# Altium PCB PCB.PcbDoc (part 1 of 2)
Units mil, origin at the board's own origin, x right, y up, seen from the top; angles counter-clockwise.
Board outline 3950.03 x 3160.03 mil, 2 copper layers (Top Layer, Bottom Layer); 198 components, 30 nets, 510 pads, 84 vias.
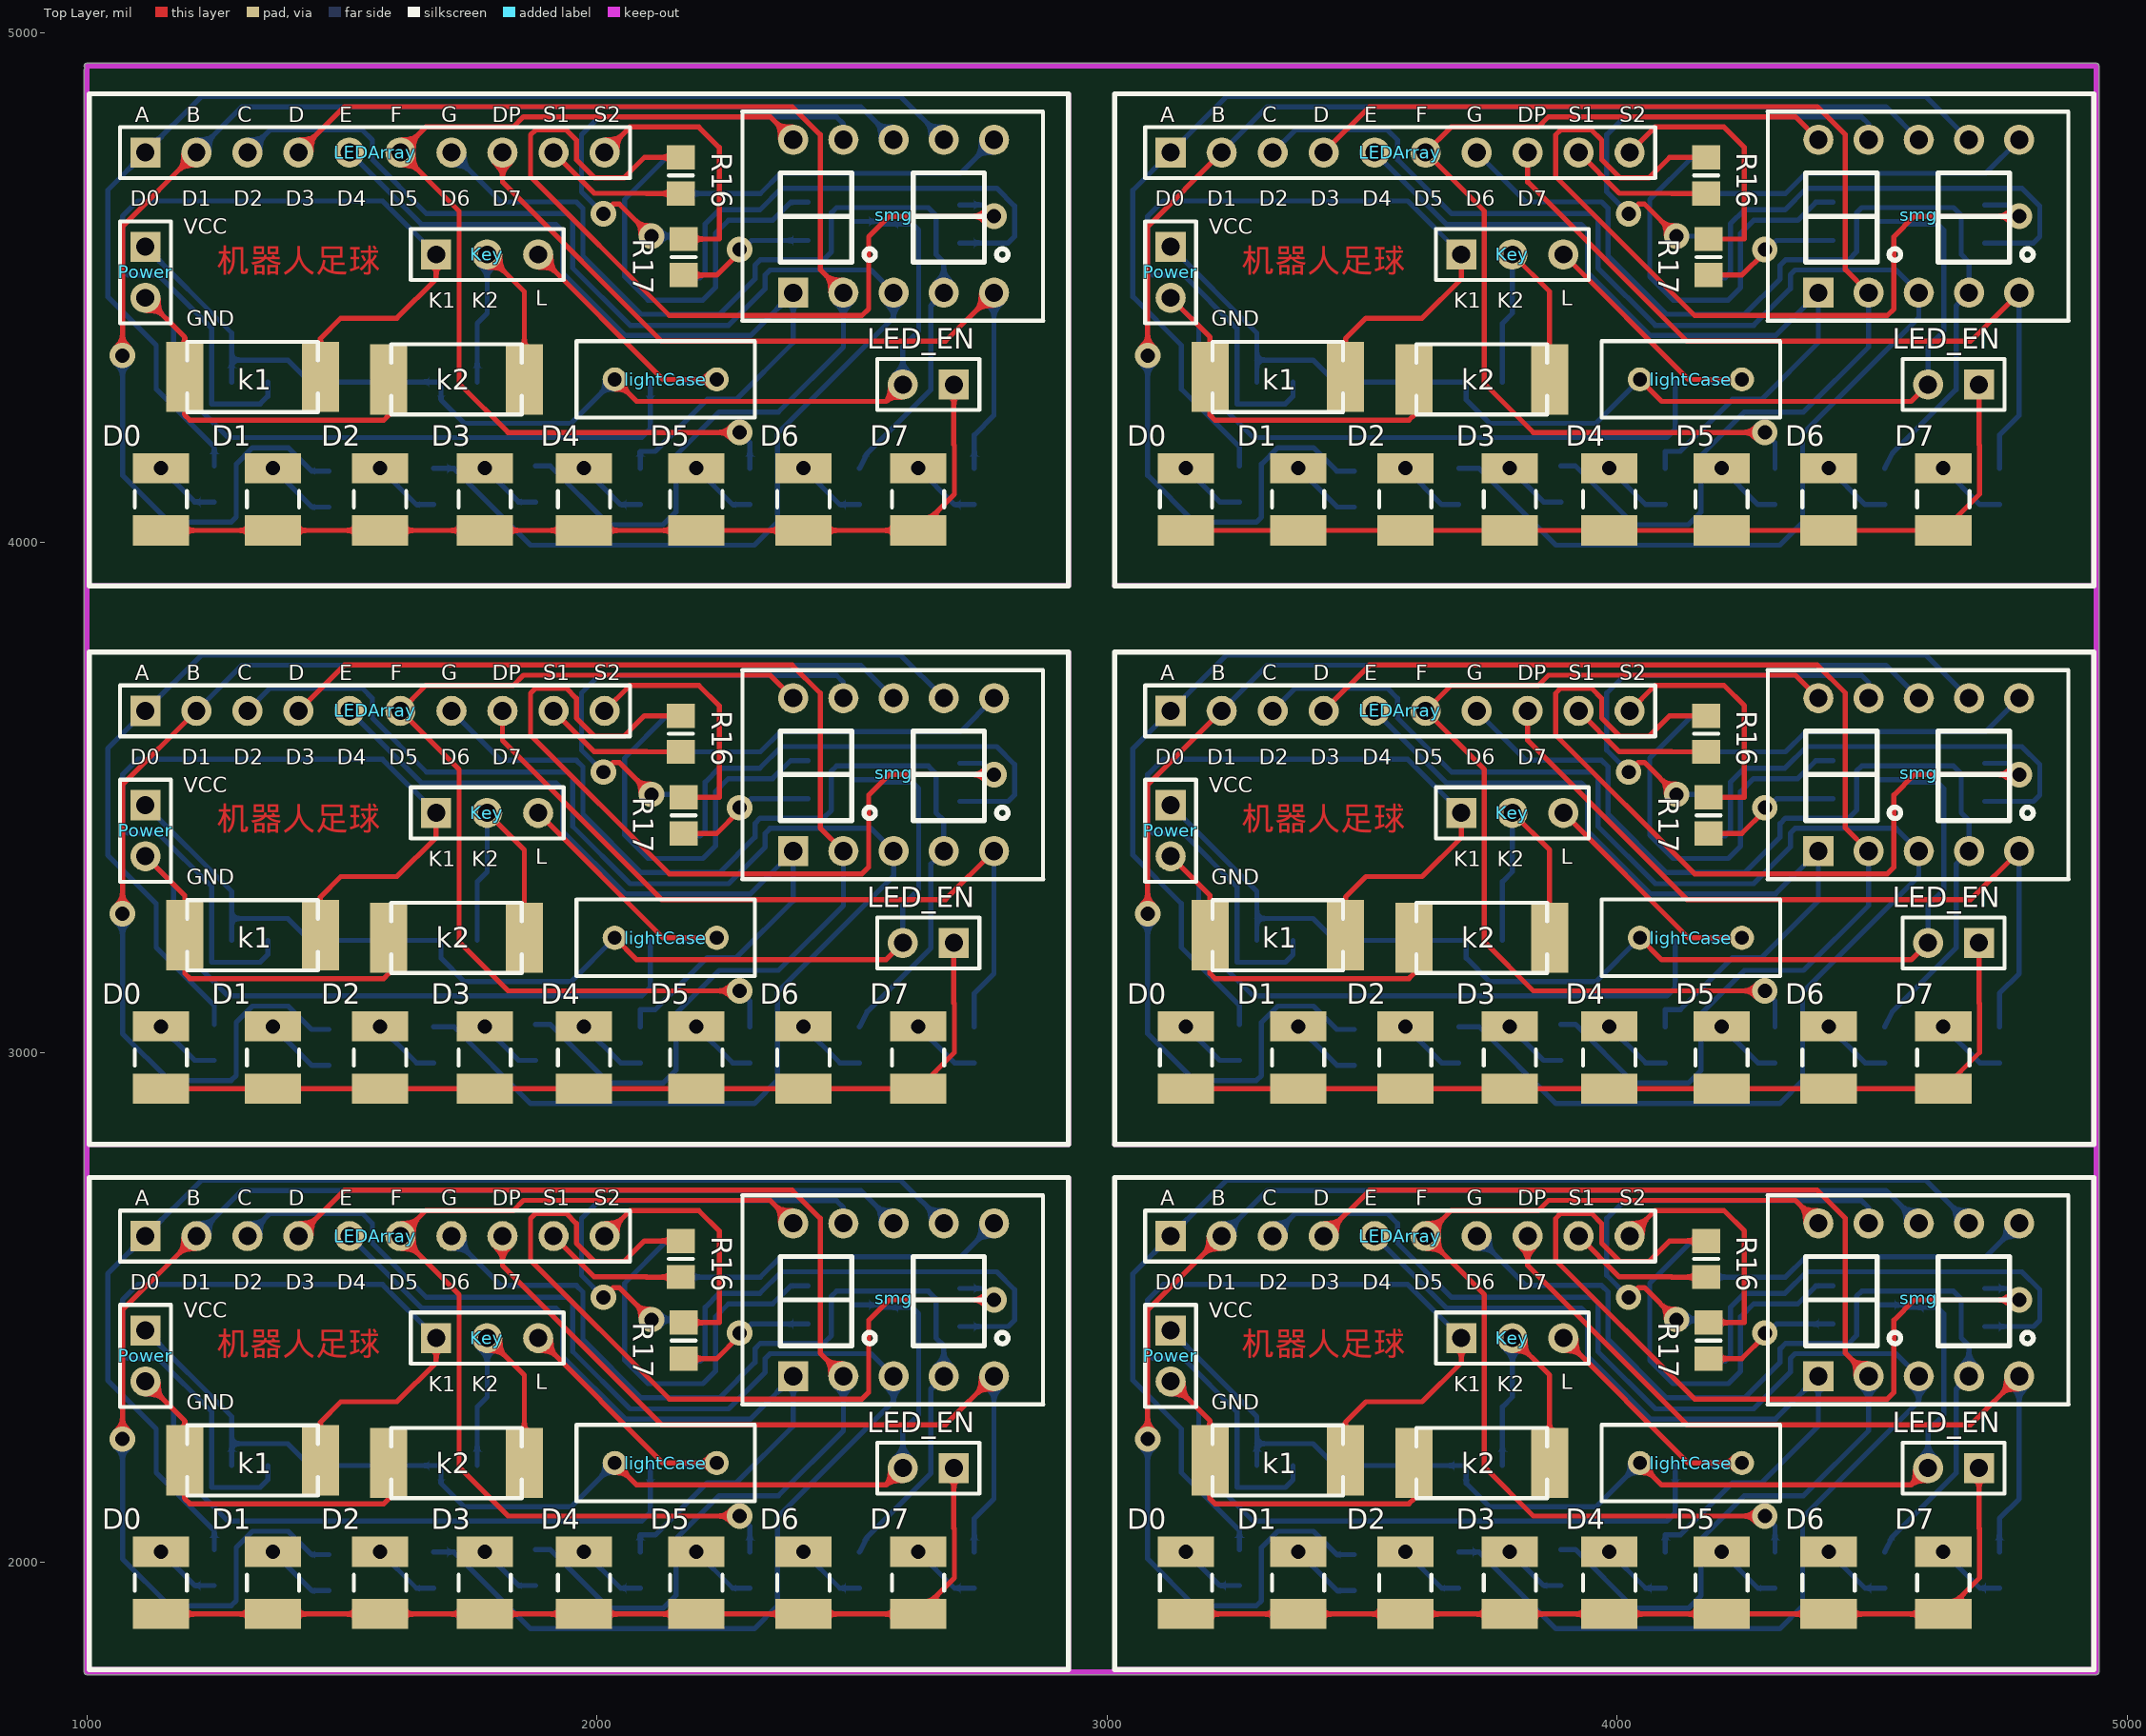
[diagram p0: Top Layer view]
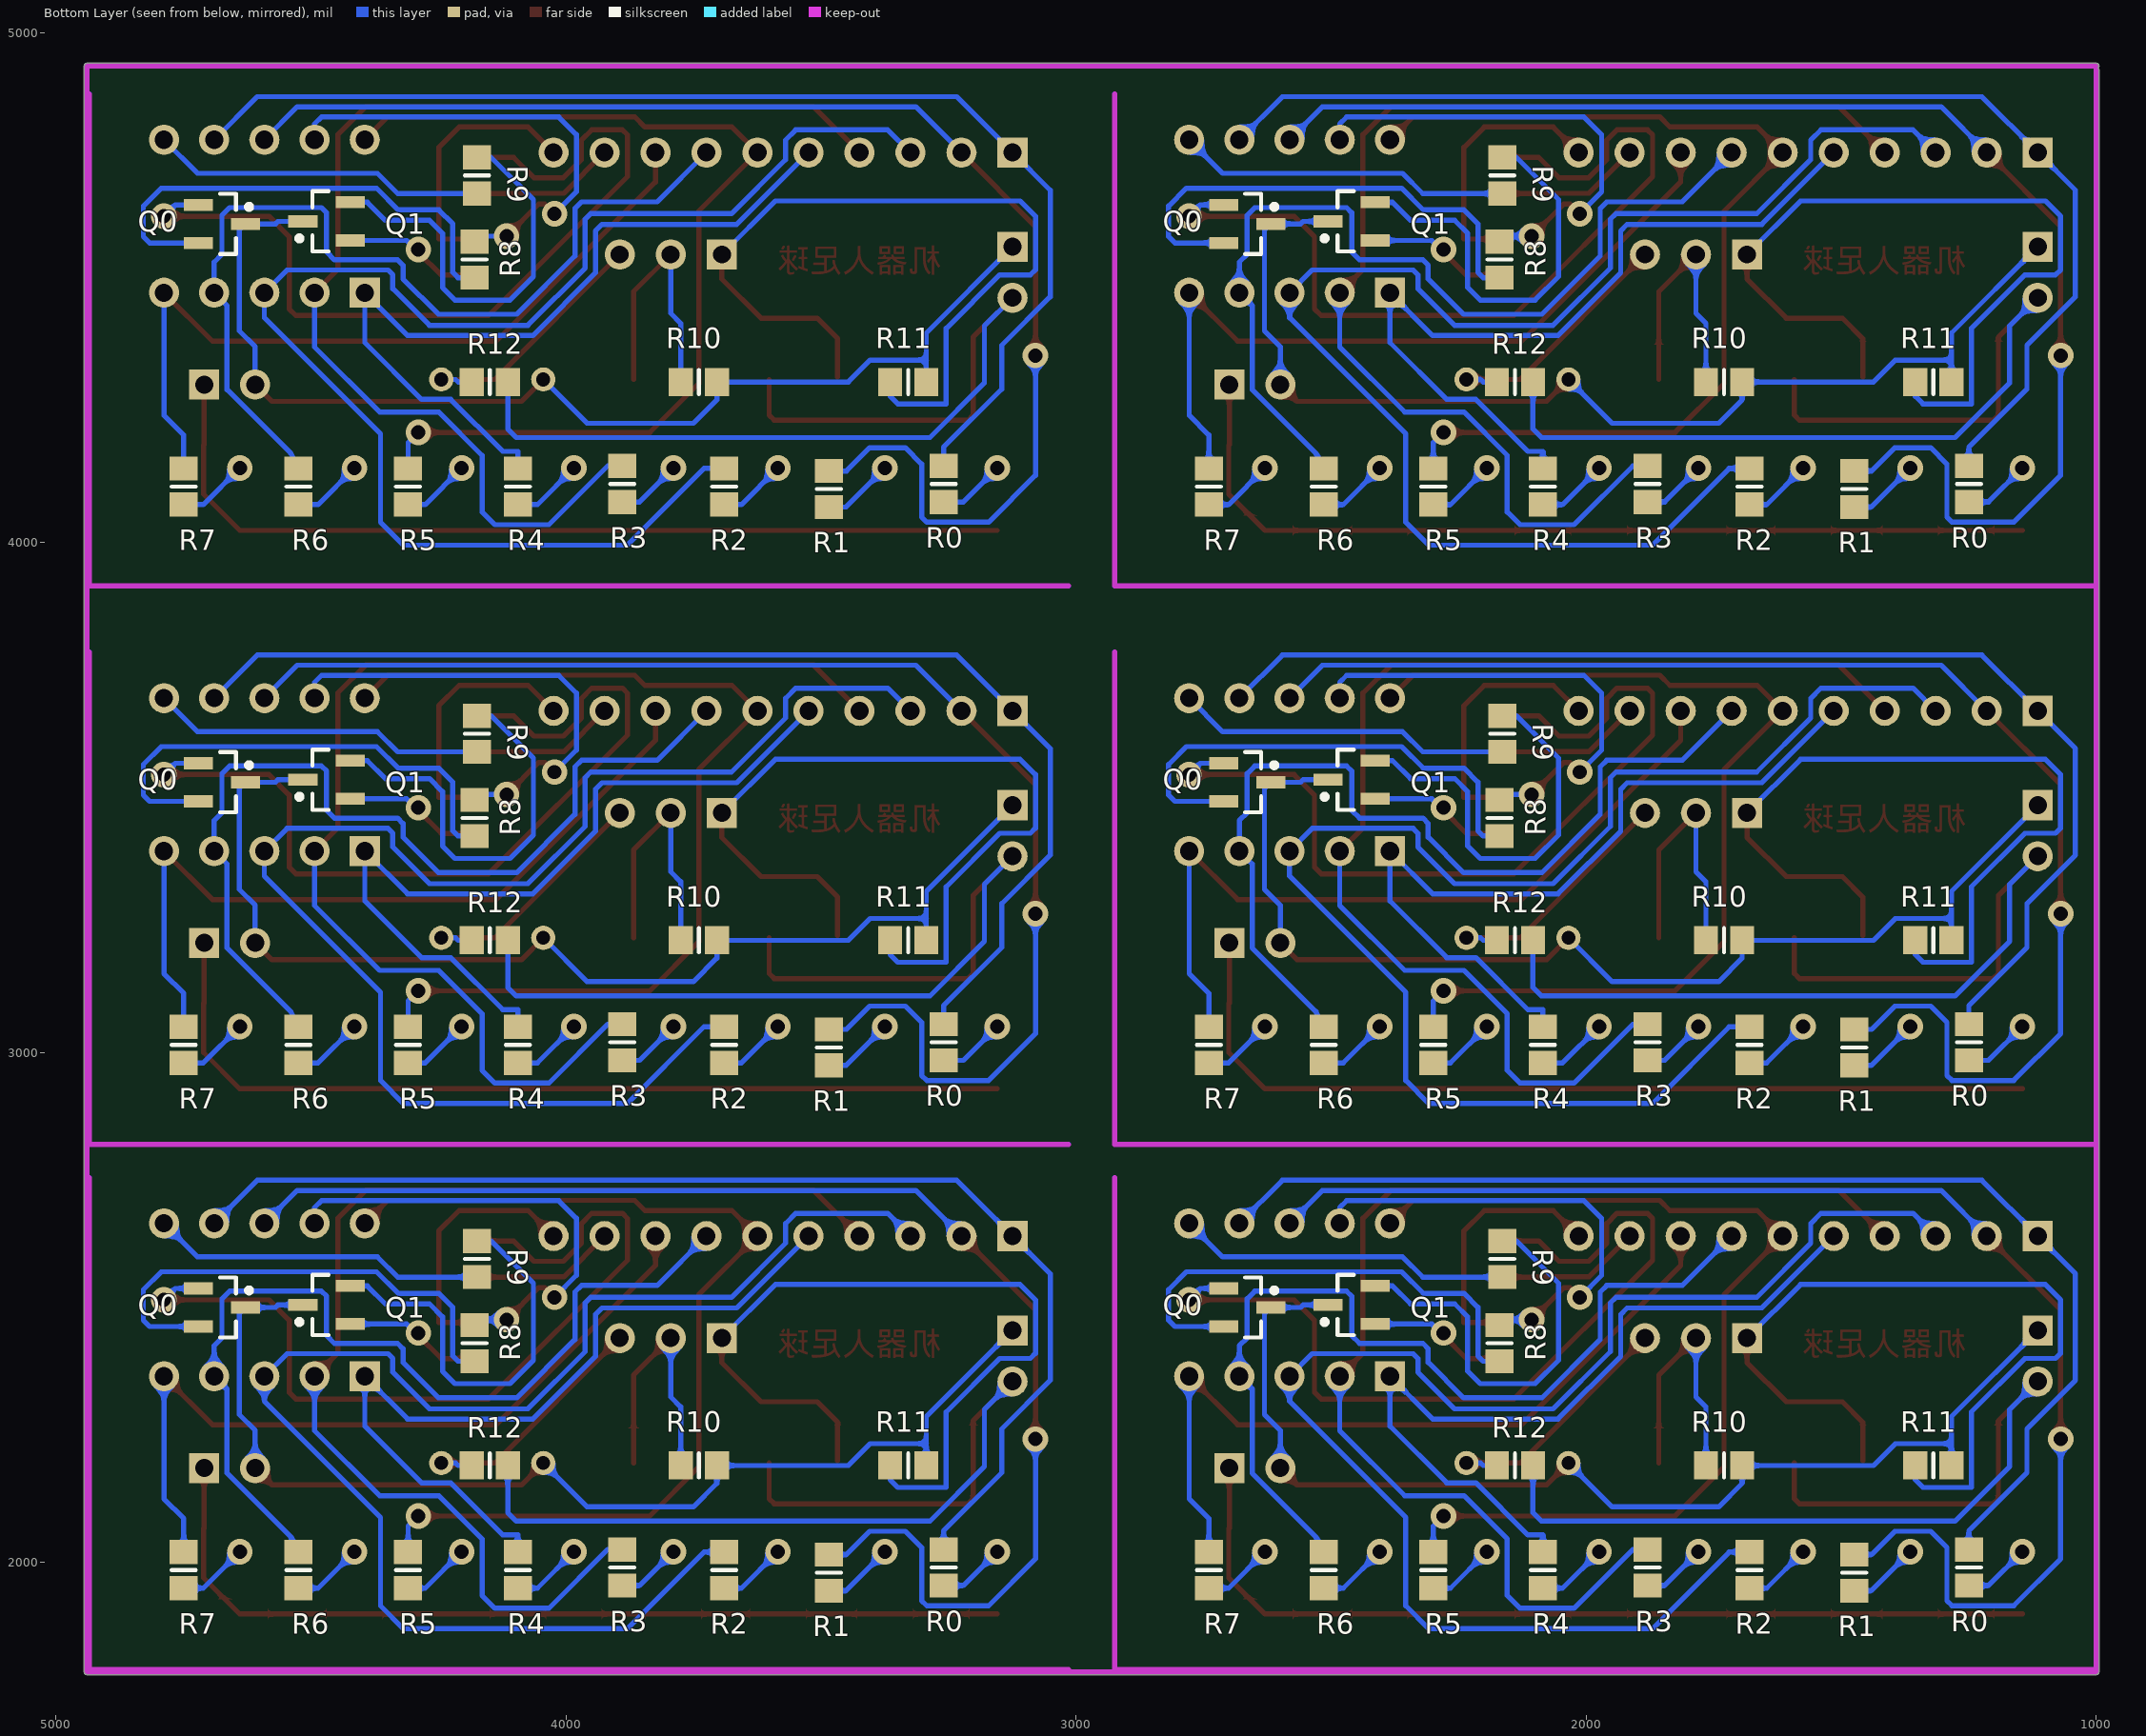
[diagram p1: Bottom Layer view, seen from below]

## Layer stack, top to bottom
Top Solder: solder mask 0.4, Solder Resist, Dk 3.5
Top Layer: signal copper 1.4
Dielectric 1: dielectric 12.6, FR-4, Dk 4.8
Bottom Layer: signal copper 1.4
Bottom Solder: solder mask 0.4, Solder Resist, Dk 3.5

## Board outline
994.99,1785 994.99,4927.01 cw(c1000,4927.01) 996.97,4931 cw(c1000,4935) 1000,4940.02 4940,4940.02 cw(c4940,4935) 4945.02,4935 4945.02,1785 cw(c4940,1785) 4940,1779.98 1000,1779.98 cw(c1000,1785)

## Design rules (kind name [scope] priority, off if disabled: settings)
Clearance [All] p1: gap=10
PolygonConnect [All] p1: connectstyle=Relief reliefconductorwidth=10 reliefentries=4 polygonreliefangle="90 Angle" airgapwidth=10
RoutingVias [All] p1: holewidth=28 width=50 viastyle="Through Hole" minholewidth=28 minwidth=50 maxholewidth=28 maxwidth=50
SolderMaskExpansion [All] p1: expansion=4
Width [All] p1: maxlimit=10 minlimit=10 preferedwidth=10
30 further rules are at their usual default settings.

## Classes and differential pairs
component class waterLEDSheet: J1 J2 J3

## Components (designator, comment, footprint, x,y, rotation, side; value= is the part's Value field where it differs from the comment)
D0 "LED0" C1210_M 1145,1960 r90 top
D0 "LED0" C1210_M 3155,1960 r90 top
D0 "LED0" C1210_M 1145,2990 r90 top
D0 "LED0" C1210_M 3155,2990 r90 top
D0 "LED0" C1210_M 3155,4085 r90 top
D0 "LED0" C1210_M 1145,4085 r90 top
D1 "LED0" C1210_M 1365,1960 r90 top
D1 "LED0" C1210_M 3375,1960 r90 top
D1 "LED0" C1210_M 1365,2990 r90 top
D1 "LED0" C1210_M 3375,2990 r90 top
D1 "LED0" C1210_M 3375,4085 r90 top
D1 "LED0" C1210_M 1365,4085 r90 top
D2 "LED0" C1210_M 1575,1960 r90 top
D2 "LED0" C1210_M 3585,1960 r90 top
D2 "LED0" C1210_M 1575,2990 r90 top
D2 "LED0" C1210_M 3585,2990 r90 top
D2 "LED0" C1210_M 3585,4085 r90 top
D2 "LED0" C1210_M 1575,4085 r90 top
D3 "LED0" C1210_M 1780,1960 r90 top
D3 "LED0" C1210_M 3790,1960 r90 top
D3 "LED0" C1210_M 1780,2990 r90 top
D3 "LED0" C1210_M 3790,2990 r90 top
D3 "LED0" C1210_M 3790,4085 r90 top
D3 "LED0" C1210_M 1780,4085 r90 top
D4 "LED0" C1210_M 1975,1960 r90 top
D4 "LED0" C1210_M 3985,1960 r90 top
D4 "LED0" C1210_M 1975,2990 r90 top
D4 "LED0" C1210_M 3985,2990 r90 top
D4 "LED0" C1210_M 3985,4085 r90 top
D4 "LED0" C1210_M 1975,4085 r90 top
D5 "LED0" C1210_M 2195,1960 r90 top
D5 "LED0" C1210_M 4205,1960 r90 top
D5 "LED0" C1210_M 2195,2990 r90 top
D5 "LED0" C1210_M 4205,2990 r90 top
D5 "LED0" C1210_M 4205,4085 r90 top
D5 "LED0" C1210_M 2195,4085 r90 top
D6 "LED0" C1210_M 2405,1960 r90 top
D6 "LED0" C1210_M 4415,1960 r90 top
D6 "LED0" C1210_M 2405,2990 r90 top
D6 "LED0" C1210_M 4415,2990 r90 top
D6 "LED0" C1210_M 4415,4085 r90 top
D6 "LED0" C1210_M 2405,4085 r90 top
D7 "LED0" C1210_M 2630,1960 r90 top
D7 "LED0" C1210_M 4640,1960 r90 top
D7 "LED0" C1210_M 2630,2990 r90 top
D7 "LED0" C1210_M 4640,2990 r90 top
D7 "LED0" C1210_M 4640,4085 r90 top
D7 "LED0" C1210_M 2630,4085 r90 top
k1 "SW-PB" KEY_SODFL_2-LEADS 1325,2200 r0 top
k1 "SW-PB" KEY_SODFL_2-LEADS 3335,2200 r0 top
k1 "SW-PB" KEY_SODFL_2-LEADS 1325,3230 r0 top
k1 "SW-PB" KEY_SODFL_2-LEADS 3335,3230 r0 top
k1 "SW-PB" KEY_SODFL_2-LEADS 3335,4325 r0 top
k1 "SW-PB" KEY_SODFL_2-LEADS 1325,4325 r0 top
k2 "SW-PB" KEY_SODFL_2-LEADS 1725,2195 r0 top
k2 "SW-PB" KEY_SODFL_2-LEADS 3735,2195 r0 top
k2 "SW-PB" KEY_SODFL_2-LEADS 1725,3225 r0 top
k2 "SW-PB" KEY_SODFL_2-LEADS 3735,3225 r0 top
k2 "SW-PB" KEY_SODFL_2-LEADS 3735,4320 r0 top
k2 "SW-PB" KEY_SODFL_2-LEADS 1725,4320 r0 top
Key "" HDR1X3 1685,2440 r0 top
Key "" HDR1X3 3695,2440 r0 top
Key "" HDR1X3 1685,3470 r0 top
Key "" HDR1X3 3695,3470 r0 top
Key "" HDR1X3 3695,4565 r0 top
Key "" HDR1X3 1685,4565 r0 top
LED_EN "" HDR1X2 2700,2185 r180 top
LED_EN "" HDR1X2 4710,2185 r180 top
LED_EN "" HDR1X2 2700,3215 r180 top
LED_EN "" HDR1X2 4710,3215 r180 top
LED_EN "" HDR1X2 4710,4310 r180 top
LED_EN "" HDR1X2 2700,4310 r180 top
LEDArray "NUM" HDR1X10 1115,2640 r0 top
LEDArray "NUM" HDR1X10 3125,2640 r0 top
LEDArray "NUM" HDR1X10 1115,3670 r0 top
LEDArray "NUM" HDR1X10 3125,3670 r0 top
LEDArray "NUM" HDR1X10 3125,4765 r0 top
LEDArray "NUM" HDR1X10 1115,4765 r0 top
lightCase "" RAD-0.2 2135,2195 r180 top
lightCase "" RAD-0.2 4145,2195 r180 top
lightCase "" RAD-0.2 2135,3225 r180 top
lightCase "" RAD-0.2 4145,3225 r180 top
lightCase "" RAD-0.2 4145,4320 r180 top
lightCase "" RAD-0.2 2135,4320 r180 top
Power "Header 2" HDR1X2 1115,2455 r270 top
Power "Header 2" HDR1X2 3125,2455 r270 top
Power "Header 2" HDR1X2 1115,3485 r270 top
Power "Header 2" HDR1X2 3125,3485 r270 top
Power "Header 2" HDR1X2 3125,4580 r270 top
Power "Header 2" HDR1X2 1115,4580 r270 top
Q0 "QNPN" SOT23_M 2665,2500 r180 bottom
Q0 "QNPN" SOT23_M 4675,2500 r180 bottom
Q0 "QNPN" SOT23_M 2665,3530 r180 bottom
Q0 "QNPN" SOT23_M 4675,3530 r180 bottom
Q0 "QNPN" SOT23_M 4675,4625 r180 bottom
Q0 "QNPN" SOT23_M 2665,4625 r180 bottom
Q1 "QNPN" SOT23_M 2460,2505 r0 bottom
Q1 "QNPN" SOT23_M 4470,2505 r0 bottom
Q1 "QNPN" SOT23_M 2460,3535 r0 bottom
Q1 "QNPN" SOT23_M 4470,3535 r0 bottom
Q1 "QNPN" SOT23_M 4470,4630 r0 bottom
Q1 "QNPN" SOT23_M 2460,4630 r0 bottom
R0 "510" 6-0805_N 1250,1990 r90 bottom
R0 "510" 6-0805_N 3260,1990 r90 bottom
R0 "510" 6-0805_N 1250,3020 r90 bottom
R0 "510" 6-0805_N 3260,3020 r90 bottom
R0 "510" 6-0805_N 3260,4115 r90 bottom
R0 "510" 6-0805_N 1250,4115 r90 bottom
R1 "510" 6-0805_N 1475,1980 r90 bottom
R1 "510" 6-0805_N 3485,1980 r90 bottom
R1 "510" 6-0805_N 1475,3010 r90 bottom
R1 "510" 6-0805_N 3485,3010 r90 bottom
R1 "510" 6-0805_N 3485,4105 r90 bottom
R1 "510" 6-0805_N 1475,4105 r90 bottom
R2 "510" 6-0805_N 1680,1985 r90 bottom
R2 "510" 6-0805_N 3690,1985 r90 bottom
R2 "510" 6-0805_N 1680,3015 r90 bottom
R2 "510" 6-0805_N 3690,3015 r90 bottom
R2 "510" 6-0805_N 3690,4110 r90 bottom
R2 "510" 6-0805_N 1680,4110 r90 bottom
R3 "510" 6-0805_N 1880,1990 r90 bottom
R3 "510" 6-0805_N 3890,1990 r90 bottom
R3 "510" 6-0805_N 1880,3020 r90 bottom
R3 "510" 6-0805_N 3890,3020 r90 bottom
R3 "510" 6-0805_N 3890,4115 r90 bottom
R3 "510" 6-0805_N 1880,4115 r90 bottom
R4 "510" 6-0805_N 2085,1985 r90 bottom
R4 "510" 6-0805_N 4095,1985 r90 bottom
R4 "510" 6-0805_N 2085,3015 r90 bottom
R4 "510" 6-0805_N 4095,3015 r90 bottom
R4 "510" 6-0805_N 4095,4110 r90 bottom
R4 "510" 6-0805_N 2085,4110 r90 bottom
R5 "510" 6-0805_N 2300,1985 r90 bottom
R5 "510" 6-0805_N 4310,1985 r90 bottom
R5 "510" 6-0805_N 2300,3015 r90 bottom
R5 "510" 6-0805_N 4310,3015 r90 bottom
R5 "510" 6-0805_N 4310,4110 r90 bottom
R5 "510" 6-0805_N 2300,4110 r90 bottom
R6 "510" 6-0805_N 2515,1985 r90 bottom
R6 "510" 6-0805_N 4525,1985 r90 bottom
R6 "510" 6-0805_N 2515,3015 r90 bottom
R6 "510" 6-0805_N 4525,3015 r90 bottom
R6 "510" 6-0805_N 4525,4110 r90 bottom
R6 "510" 6-0805_N 2515,4110 r90 bottom
R7 "510" 6-0805_N 2740,1985 r90 bottom
R7 "510" 6-0805_N 4750,1985 r90 bottom
R7 "510" 6-0805_N 2740,3015 r90 bottom
R7 "510" 6-0805_N 4750,3015 r90 bottom
R7 "510" 6-0805_N 4750,4110 r90 bottom
R7 "510" 6-0805_N 2740,4110 r90 bottom
R8 "" 6-0805_N 2170,2430 r90 bottom
R8 "" 6-0805_N 4180,2430 r90 bottom
R8 "" 6-0805_N 2170,3460 r90 bottom
R8 "" 6-0805_N 4180,3460 r90 bottom
R8 "" 6-0805_N 4180,4555 r90 bottom
R8 "" 6-0805_N 2170,4555 r90 bottom
R9 "" 6-0805_N 2165,2595 r270 bottom
R9 "" 6-0805_N 4175,2595 r270 bottom
R9 "" 6-0805_N 2165,3625 r270 bottom
R9 "" 6-0805_N 4175,3625 r270 bottom
R9 "" 6-0805_N 4175,4720 r270 bottom
R9 "" 6-0805_N 2165,4720 r270 bottom
R10 "" 6-0805_N 1730,2190 r0 bottom
R10 "" 6-0805_N 3740,2190 r0 bottom
R10 "" 6-0805_N 1730,3220 r0 bottom
R10 "" 6-0805_N 3740,3220 r0 bottom
R10 "" 6-0805_N 3740,4315 r0 bottom
R10 "" 6-0805_N 1730,4315 r0 bottom
R11 "" 6-0805_N 1319.57,2190 r180 bottom
R11 "" 6-0805_N 3329.57,2190 r180 bottom
R11 "" 6-0805_N 1319.57,3220 r180 bottom
R11 "" 6-0805_N 3329.57,3220 r180 bottom
R11 "" 6-0805_N 3329.57,4315 r180 bottom
R11 "" 6-0805_N 1319.57,4315 r180 bottom
R12 "Res3" 6-0805_N 2140,2190 r0 bottom
R12 "Res3" 6-0805_N 4150,2190 r0 bottom
R12 "Res3" 6-0805_N 2140,3220 r0 bottom
R12 "Res3" 6-0805_N 4150,3220 r0 bottom
R12 "Res3" 6-0805_N 4150,4315 r0 bottom
R12 "Res3" 6-0805_N 2140,4315 r0 bottom
R16 "Res2" 6-0805_N 2165,2595 r90 top
R16 "Res2" 6-0805_N 4175,2595 r90 top
R16 "Res2" 6-0805_N 2165,3625 r90 top
R16 "Res2" 6-0805_N 4175,3625 r90 top
R16 "Res2" 6-0805_N 4175,4720 r90 top
R16 "Res2" 6-0805_N 2165,4720 r90 top
R17 "Res2" 6-0805_N 2170,2435 r270 top
R17 "Res2" 6-0805_N 4180,2435 r270 top
R17 "Res2" 6-0805_N 2170,3465 r270 top
R17 "Res2" 6-0805_N 4180,3465 r270 top
R17 "Res2" 6-0805_N 4180,4560 r270 top
R17 "Res2" 6-0805_N 2170,4560 r270 top
smg "Component_1" NIXIE_LIGHT 2520,2575 r0 top
smg "Component_1" NIXIE_LIGHT 4530,2575 r0 top
smg "Component_1" NIXIE_LIGHT 2520,3605 r0 top
smg "Component_1" NIXIE_LIGHT 4530,3605 r0 top
smg "Component_1" NIXIE_LIGHT 4530,4700 r0 top
smg "Component_1" NIXIE_LIGHT 2520,4700 r0 top

## Footprints (in the part's own frame and the unit in brackets; to place one, negate y for a bottom-side part, rotate by r counter-clockwise, add the part's x,y. Pads: shape width x height; smd on the part's side, far side on the other; paste and mask are expansions set on the pad)
6-0805_N [mm] "Chip Resistor, Body 2.0x1.2mm, IPC Medium Density"
  rect 1.2x1.4 smd: 1(-0.9,0) 2(0.9,0)
  silkscreen extent 0,-0.6 0,0.6, body extent -1.07,-0.7 1.07,0.7, height 0.7
C1210_M [mm]
  rect 1.5x2.8 smd: 1(-1.55,0) 2(1.55,0)
  silkscreen extent -0.4,-1.3 0.4,1.3, body extent -1.7,-1.35 1.7,1.35, height 1.5
HDR1X2 [mm] "Connector; Header; 2 Position"
  rect 1.5x1.5 hole 0.9: 1(0,0)
  round 1.5 hole 0.9: 2(2.54,0)
  silkscreen extent -1.27,-1.27 3.81,1.27
HDR1X3 [mm] "Connector; Header; 3 Position"
  rect 1.5x1.5 hole 0.9: 1(0,0)
  round 1.5 hole 0.9: 2(2.54,0) 3(5.08,0)
  silkscreen extent -1.27,-1.27 6.35,1.27
HDR1X10 [mm] "Connector; Header; 10 Position"
  rect 1.5x1.5 hole 0.9: 1(0,0)
  round 1.5 hole 0.9: 2(2.54,0) 3(5.08,0) 4(7.62,0) 5(10.16,0) 6(12.7,0) 7(15.24,0) 8(17.78,0) 9(20.32,0) 10(22.86,0)
  silkscreen extent -1.27,-1.27 24.13,1.27
KEY_SODFL_2-LEADS [mm] "SODFL, 2-Leads, Body 3.25x8.00mm, IPC Medium Density"
  rect 1.85x3.5 smd: 1(-3.375,0) 2(3.375,0)
  silkscreen extent -3.25,-1.75 3.25,1.75, body extent -3.25,-1.65 3.25,1.85, height 2
NIXIE_LIGHT [mm]
  rect 1.5x1.5 hole 0.905: 1(-3.429,-5.334)
  round 1.5 hole 0.905: 2(-0.929,-5.334) 3(1.571,-5.334) 4(4.071,-5.334) 5(6.571,-5.334) 6(6.571,2.286) 7(4.071,2.286) 8(1.571,2.286) 9(-0.929,2.286) 10(-3.429,2.286)
  silkscreen extent -5.97,-6.73 9.03,3.68
RAD-0.2 [mm] "Radial Cap, Thru-Hole; 2 Leads; 0.2 in Pin Spacing"
  round 1.2 hole 0.7: 1(-2.54,0) 2(2.54,0)
  silkscreen extent -4.44,-1.91 4.44,1.91
SOT23_M [mm] "SOT23, 3-Leads, Body 2.9x1.3mm, Pitch 0.95mm, Lead Span 2.3mm - Reverse Pinning, IPC Low Density"
  rect 1.45x0.6 smd: 1(1.175,0) 2(-1.175,0.95) 3(-1.175,-0.95)
  silkscreen extent -0.1,-1.5 1.47,1.5, body extent -0.7,-1.5 0.7,1.5, height 1.1

## Part data
D0 D0 D0 D0 D0 D0 D1 D1 D1 D1 D1 D1 D2 D2 D2 D2 D2 D2 D3 D3 D3 D3 D3 D3 D4 D4 D4 D4 D4 D4 D5 D5 D5 D5 D5 D5 D6 D6 D6 D6 D6 D6 D7 D7 D7 D7 D7 D7: "Typical INFRARED GaAs LED"
k1 k1 k1 k1 k1 k1 k2 k2 k2 k2 k2 k2: "Switch"
Key Key Key Key Key Key: library part "Header 3", "Header, 3-Pin"
LED_EN LED_EN LED_EN LED_EN LED_EN LED_EN: library part "Header 2", "Header, 2-Pin"
LEDArray LEDArray LEDArray LEDArray LEDArray LEDArray: library part "Header 10", "Header, 10-Pin"
lightCase lightCase lightCase lightCase lightCase lightCase: library part "Res Adj1", "Variable Resistor"
Power Power Power Power Power Power: "Header, 2-Pin"
Q0 Q0 Q0 Q0 Q0 Q0 Q1 Q1 Q1 Q1 Q1 Q1: "NPN Bipolar Transistor"
R0 R0 R0 R0 R0 R0 R1 R1 R1 R1 R1 R1 R2 R2 R2 R2 R2 R2 R3 R3 R3 R3 R3 R3 R4 R4 R4 R4 R4 R4 R5 R5 R5 R5 R5 R5 R6 R6 R6 R6 R6 R6 R7 R7 R7 R7 R7 R7 R8 R8 R8 R8 R8 R8 R9 R9 R9 R9 R9 R9 R10 R10 R10 R10 R10 R10 R11 R11 R11 R11 R11 R11: library part Res2, "Resistor"
R12 R12 R12 R12 R12 R12 R16 R16 R16 R16 R16 R16 R17 R17 R17 R17 R17 R17: "Resistor"

## Via types
v1: diameter 50, hole 28, Top Layer to Bottom Layer, 84 vias

## Nets (pads, with @x,y where several pads share a name; then routed paths per layer and width w, separated by ;. In a path a pad name is that pad's centre, name@x,y a point inside that pad or via, vN(x,y) a via of type N, cw(c..) or ccw(c..) an arc to the next point about the centre after c; other vN are vias at no path point)
A: LEDArray.1@1115,4765 R0.2@1250,4150.43 smg.7@2680.28,4790 | length 2377.4
  Bottom Layer w10: R0.2@1250,4150.43 1250,4187 1136,4301 1136,4387 1041,4482 1041,4691 LEDArray.1@1115,4765 1224.53,4874.53 2595.75,4874.53 smg.7@2680.28,4790
B: LEDArray.2@1215,4765 R1.2@1475,4140.43 smg.8@2581.85,4790 | length 2707.1
  Top Layer w10: v1(1070,4367) 1070,4620 LEDArray.2@1215,4765
  Bottom Layer w10: v1(1070,4367) 1070,4132 1162,4040 1283,4040 1293,4050 1293,4154.02 1325,4186.02 1394.98,4186.02 1440.57,4140.43 R1.2@1475,4140.43 ; LEDArray.2@1215,4765 1304.53,4854.53 2517.32,4854.53 smg.8@2581.85,4790
C: LEDArray.3@1315,4765 R2.2@1680,4145.43 smg.3@2581.85,4490 | length 2901.3
  Bottom Layer w10: LEDArray.3@1315,4765 1359.53,4809.53 1540,4809.53 1560,4789.53 1560,4751 1666,4645 1942,4645 1952.72,4634.28 1952.72,4538.57 2065.21,4426.09 2258.12,4426.09 2330,4497.97 2330,4525 2339.53,4534.53 2537.32,4534.53 smg.3@2581.85,4490 2581.85,4440.92 2354,4213.07 2354,4040 2309,3995 1870.43,3995 1720,4145.43 R2.2@1680,4145.43
D: LEDArray.4@1415,4765 R3.2@1880,4150.43 smg.2@2483.43,4490 | length 2379
  Top Layer w10: LEDArray.4@1415,4765 1505,4855 2383,4855 2438,4800 2438,4535.43 smg.2@2483.43,4490
  Bottom Layer w10: R3.2@1880,4150.43 1908.57,4150.43 2024,4035 2130,4035 2155,4060 2155,4171 2240,4256 2356,4256 2483.43,4383.43 smg.2@2483.43,4490
DP: LEDArray.8@1815,4765 R7.2@2740,4145.43 smg.5@2778.7,4490 | length 1550.8
  Top Layer w10: LEDArray.8@1815,4765 1815,4707.09 2127.09,4395 2683.7,4395 smg.5@2778.7,4490
  Bottom Layer w10: R7.2@2740,4145.43 2740,4211 2778.7,4249.7 smg.5@2778.7,4490
E: LEDArray.5@1515,4765 R4.2@2085,4145.43 smg.1@2385,4490 | length 1621.3
  Bottom Layer w10: LEDArray.5@1515,4765 1656,4624 1920,4624 1932.72,4611.28 1932.72,4528.98 2055.61,4406.09 2301.09,4406.09 smg.1@2385,4490 2385,4392.24 2273.76,4281 2216.5,4281 2114.5,4179 2085,4179 R4.2@2085,4145.43
F: LEDArray.6@1615,4765 R5.2@2300,4145.43 smg.10@2385,4790 | length 1986.9
  Top Layer w10: v1(2280,4216) 1826,4216 1730,4312 1730,4650 LEDArray.6@1615,4765 1665,4815 1835.94,4815 1855.94,4835 2340,4835 smg.10@2385,4790
  Bottom Layer w10: v1(2280,4216) 2300,4196 R5.2@2300,4145.43
G: LEDArray.7@1715,4765 R6.2@2515,4145.43 smg.4@2680.28,4490 | length 1858.4
  Bottom Layer w10: LEDArray.7@1715,4765 1811.88,4668.12 1959.88,4668.12 1972.72,4655.28 1972.72,4562.19 2087.15,4447.77 2240.54,4447.77 2310,4517.22 2310,4544.06 2320.47,4554.53 2444.53,4554.53 2460,4570 2460,4647 2470,4657 2650,4657 2665,4642 2665,4565.28 2680.28,4550 smg.4@2680.28,4490 2655,4464.72 2655,4300 2530,4175 R6.2@2515,4145.43
GND: k1.1@1192.13,4325 k2.1@1592.13,4320 Power.2@1115,4480 R12.1@2104.57,4315 | length 2008.1
  Top Layer w10: Power.2@1115,4480 1192.13,4402.87 k1.1@1192.13,4325 1192.13,4250 1202.13,4240 1582.13,4240 1592.13,4250 k2.1@1592.13,4320
  Bottom Layer w10: Power.2@1115,4480 1170,4425 1170,4313 1276.98,4206.02 2087.93,4206.02 2104.57,4222.67 R12.1@2104.57,4315
K1: k1.2@1457.87,4325 Key.1@1685,4565 R11.1@1355,4315 | length 1689.4
  Top Layer w10: k1.2@1457.87,4325 1457.87,4400 1497.87,4440 1608,4440 1685,4517 Key.1@1685,4565
  Bottom Layer w10: R11.1@1355,4315 1355,4287 1340,4272 1245,4272 1245,4420 1140,4525 1080,4525 1070,4535 1070,4640 1100,4670 1580,4670 Key.1@1685,4565
K2: k2.2@1857.87,4320 Key.2@1785,4565 R10.2@1765.43,4315 | length 533.3
  Top Layer w10: Key.2@1785,4565 1857.87,4492.13 k2.2@1857.87,4320
  Bottom Layer w10: R10.2@1765.43,4315 1765.43,4430 1785,4449.57 Key.2@1785,4565
LIGHTCASE: Key.3@1885,4565 lightCase.1@2235,4320 R12.2@2175.43,4315 | length 513.1
  Top Layer w10: Key.3@1885,4565 2130,4320 lightCase.1@2235,4320
  Bottom Layer w10: R12.2@2175.43,4315 2202,4315 2207,4320 lightCase.1@2235,4320
NetD0_1: D0.1@1145,4023.98 D1.1@1365,4023.98 D2.1@1575,4023.98 D3.1@1780,4023.98 D4.1@1975,4023.98 D5.1@2195,4023.98 D6.1@2405,4023.98 D7.1@2630,4023.98 LED_EN.1@2700,4310 | length 1800.8
  Top Layer w10: D0.1@1145,4023.98 D1.1@1365,4023.98 D2.1@1575,4023.98 D3.1@1780,4023.98 D4.1@1975,4023.98 D5.1@2195,4023.98 D6.1@2405,4023.98 D7.1@2630,4023.98 2701,4094.98 2701,4191 2700,4192 LED_EN.1@2700,4310
NetD0_2: D0.2@1145,4146.02 R0.1@1250,4079.57 | length 132.5
  Bottom Layer w10: v1(1145,4146.02) 1211.46,4079.57 R0.1@1250,4079.57
NetD1_2: D1.2@1365,4146.02 R1.1@1475,4069.57 | length 141.7
  Bottom Layer w10: v1(1365,4146.02) 1441.46,4069.57 R1.1@1475,4069.57
NetD2_2: D2.2@1575,4146.02 R2.1@1680,4074.57 | length 134.6
  Bottom Layer w10: v1(1575,4146.02) 1646.46,4074.57 R2.1@1680,4074.57
NetD3_2: D3.2@1780,4146.02 R3.1@1880,4079.57 | length 127.5
  Bottom Layer w10: v1(1780,4146.02) 1846.46,4079.57 R3.1@1880,4079.57
NetD4_2: D4.2@1975,4146.02 R4.1@2085,4074.57 | length 139.6
  Bottom Layer w10: v1(1975,4146.02) 2046.46,4074.57 R4.1@2085,4074.57
NetD5_2: D5.2@2195,4146.02 R5.1@2300,4074.57 | length 134.6
  Bottom Layer w10: v1(2195,4146.02) 2266.46,4074.57 R5.1@2300,4074.57
NetD6_2: D6.2@2405,4146.02 R6.1@2515,4074.57 | length 139.6
  Bottom Layer w10: v1(2405,4146.02) 2476.46,4074.57 R6.1@2515,4074.57
NetD7_2: D7.2@2630,4146.02 R7.1@2740,4074.57 | length 139.6
  Bottom Layer w10: v1(2630,4146.02) 2701.46,4074.57 R7.1@2740,4074.57
NetQ0_2: Q0.2@2711.26,4662.4 R16.2@2165,4755.43 | length 1721.2
  Top Layer w10: R16.2@2165,4755.43 2093.43,4755.43 2053.53,4715.53 1995.47,4715.53 1960,4751 1960,4789.53 1940,4809.53 1880,4809.53 1870,4799.53 1870,4717.75 2142.27,4445.47 2520,4445.47 2533,4458.47 2533,4600 2573,4640 v1(2779,4640)
  Bottom Layer w10: Q0.2@2711.26,4662.4 2756.6,4662.4 v1(2779,4640)
NetQ0_3: Q0.3@2711.26,4587.6 R8.1@2170,4519.57 | length 964.8
  Bottom Layer w10: R8.1@2170,4519.57 2202.13,4519.57 2212.56,4530 2212.56,4625.16 2240,4652.6 2319.6,4652.6 2362,4695 2784,4695 2819,4660 2819,4600 2806.6,4587.6 Q0.3@2711.26,4587.6
NetQ1_2: Q1.2@2413.74,4592.6 R17.2@2170,4524.57 | length 275.1
  Top Layer w10: R17.2@2170,4524.57 2234.97,4524.57 2280,4569.6 v1(2280,4575)
  Bottom Layer w10: v1(2280,4575) 2285.4,4575 2303,4592.6 Q1.2@2413.74,4592.6
NetQ1_3: Q1.3@2413.74,4667.4 R9.1@2165,4755.43 | length 816.1
  Bottom Layer w10: R9.1@2165,4755.43 2137.43,4755.43 2054.44,4672.44 2054.44,4521.56 2100.44,4475.56 2208.12,4475.56 2232.56,4500 2232.56,4606.56 2258,4632 2344.6,4632 2380,4667.4 Q1.3@2413.74,4667.4
NetR8_2: R8.2@2170,4590.43 smg.9@2483.43,4790 | length 938.7
  Top Layer w10: v1(2013,4645) 2032,4664 2044,4664 v1(2107,4601)
  Bottom Layer w10: v1(2013,4645) 1970,4688 1970,4800 2004.53,4834.53 2470,4834.53 2483.43,4821.1 smg.9@2483.43,4790 ; v1(2107,4601) 2170,4601 R8.2@2170,4590.43
NetR9_2: R9.2@2165,4684.57 smg.6@2778.7,4790 | length 657.4
  Bottom Layer w10: R9.2@2165,4684.57 2320.55,4684.57 2360.2,4724.21 2712.91,4724.21 smg.6@2778.7,4790
S1: LEDArray.9@1915,4765 R16.1@2165,4684.57 | length 283.3
  Top Layer w10: LEDArray.9@1915,4765 1995,4685 2097.2,4685 2097.63,4684.57 R16.1@2165,4684.57
S2: LEDArray.10@2015,4765 R17.1@2170,4595.43 | length 511.8
  Top Layer w10: LEDArray.10@2015,4765 2065,4815 2200,4815 2240,4775 2240,4595.43 R17.1@2170,4595.43
VCC: LED_EN.2@2600,4310 lightCase.2@2035,4320 Power.1@1115,4580 Q0.1@2618.74,4625 Q1.1@2506.26,4630 R10.1@1694.57,4315 R11.2@1284.13,4315 | length 2237.4
  Top Layer w10: lightCase.2@2035,4320 2078,4277 2567,4277 LED_EN.2@2600,4310
  Bottom Layer w10: Power.1@1115,4580 1284.13,4410.87 1284.13,4358 ; R11.2@1284.13,4315 1284.13,4358 ; lightCase.2@2035,4320 1949,4234 1740.57,4234 1694.57,4280 R10.1@1694.57,4315 1437,4315 1394,4358 1284.13,4358 ; Q1.1@2506.26,4630 2555.2,4630 2560.2,4625 Q0.1@2618.74,4625 2631,4612.74 2631,4415 2600,4384 LED_EN.2@2600,4310
pads on no net: D0.1@1145,1898.98 D0.1@1145,2928.98 D0.1@3155,1898.98 D0.1@3155,2928.98 D0.1@3155,4023.98 D0.2@1145,2021.02 D0.2@1145,3051.02 D0.2@3155,2021.02 D0.2@3155,3051.02 D0.2@3155,4146.02 D1.1@1365,1898.98 D1.1@1365,2928.98 D1.1@3375,1898.98 D1.1@3375,2928.98 D1.1@3375,4023.98 D1.2@1365,2021.02 D1.2@1365,3051.02 D1.2@3375,2021.02 D1.2@3375,3051.02 D1.2@3375,4146.02 D2.1@1575,1898.98 D2.1@1575,2928.98 D2.1@3585,1898.98 D2.1@3585,2928.98 D2.1@3585,4023.98 D2.2@1575,2021.02 D2.2@1575,3051.02 D2.2@3585,2021.02 D2.2@3585,3051.02 D2.2@3585,4146.02 D3.1@1780,1898.98 D3.1@1780,2928.98 D3.1@3790,1898.98 D3.1@3790,2928.98 D3.1@3790,4023.98 D3.2@1780,2021.02 D3.2@1780,3051.02 D3.2@3790,2021.02 D3.2@3790,3051.02 D3.2@3790,4146.02 D4.1@1975,1898.98 D4.1@1975,2928.98 D4.1@3985,1898.98 D4.1@3985,2928.98 D4.1@3985,4023.98 D4.2@1975,2021.02 D4.2@1975,3051.02 D4.2@3985,2021.02 D4.2@3985,3051.02 D4.2@3985,4146.02 D5.1@2195,1898.98 D5.1@2195,2928.98 D5.1@4205,1898.98 D5.1@4205,2928.98 D5.1@4205,4023.98 D5.2@2195,2021.02 D5.2@2195,3051.02 D5.2@4205,2021.02 D5.2@4205,3051.02 D5.2@4205,4146.02 D6.1@2405,1898.98 D6.1@2405,2928.98 D6.1@4415,1898.98 D6.1@4415,2928.98 D6.1@4415,4023.98 D6.2@2405,2021.02 D6.2@2405,3051.02 D6.2@4415,2021.02 D6.2@4415,3051.02 D6.2@4415,4146.02 D7.1@2630,1898.98 D7.1@2630,2928.98 D7.1@4640,1898.98 D7.1@4640,2928.98 D7.1@4640,4023.98 D7.2@2630,2021.02 D7.2@2630,3051.02 D7.2@4640,2021.02 D7.2@4640,3051.02 D7.2@4640,4146.02 k1.1@1192.13,2200 k1.1@1192.13,3230 k1.1@3202.13,2200 k1.1@3202.13,3230 k1.1@3202.13,4325 k1.2@1457.87,2200 k1.2@1457.87,3230 k1.2@3467.87,2200 k1.2@3467.87,3230 k1.2@3467.87,4325 k2.1@1592.13,2195 k2.1@1592.13,3225 k2.1@3602.13,2195 k2.1@3602.13,3225 k2.1@3602.13,4320 k2.2@1857.87,2195 k2.2@1857.87,3225 k2.2@3867.87,2195 k2.2@3867.87,3225 k2.2@3867.87,4320 Key.1@1685,2440 Key.1@1685,3470 Key.1@3695,2440 Key.1@3695,3470 Key.1@3695,4565 Key.2@1785,2440 Key.2@1785,3470 Key.2@3795,2440 Key.2@3795,3470 Key.2@3795,4565 Key.3@1885,2440 Key.3@1885,3470 Key.3@3895,2440 Key.3@3895,3470 Key.3@3895,4565 LED_EN.1@2700,2185 LED_EN.1@2700,3215 LED_EN.1@4710,2185 LED_EN.1@4710,3215 LED_EN.1@4710,4310 LED_EN.2@2600,2185 LED_EN.2@2600,3215 LED_EN.2@4610,2185 LED_EN.2@4610,3215 LED_EN.2@4610,4310 LEDArray.1@1115,2640 LEDArray.1@1115,3670 LEDArray.1@3125,2640 LEDArray.1@3125,3670 LEDArray.1@3125,4765 LEDArray.2@1215,2640 LEDArray.2@1215,3670 LEDArray.2@3225,2640 LEDArray.2@3225,3670 LEDArray.2@3225,4765 LEDArray.3@1315,2640 LEDArray.3@1315,3670 LEDArray.3@3325,2640 LEDArray.3@3325,3670 LEDArray.3@3325,4765 LEDArray.4@1415,2640 LEDArray.4@1415,3670 LEDArray.4@3425,2640 LEDArray.4@3425,3670 LEDArray.4@3425,4765 LEDArray.5@1515,2640 LEDArray.5@1515,3670 LEDArray.5@3525,2640 LEDArray.5@3525,3670 LEDArray.5@3525,4765 LEDArray.6@1615,2640 LEDArray.6@1615,3670 LEDArray.6@3625,2640 LEDArray.6@3625,3670 LEDArray.6@3625,4765 LEDArray.7@1715,2640 LEDArray.7@1715,3670 LEDArray.7@3725,2640 LEDArray.7@3725,3670 LEDArray.7@3725,4765 LEDArray.8@1815,2640 LEDArray.8@1815,3670 LEDArray.8@3825,2640 LEDArray.8@3825,3670 LEDArray.8@3825,4765 LEDArray.9@1915,2640 LEDArray.9@1915,3670 LEDArray.9@3925,2640 LEDArray.9@3925,3670 LEDArray.9@3925,4765 LEDArray.10@2015,2640 LEDArray.10@2015,3670 LEDArray.10@4025,2640 LEDArray.10@4025,3670 LEDArray.10@4025,4765 lightCase.1@2235,2195 lightCase.1@2235,3225 lightCase.1@4245,2195 lightCase.1@4245,3225 lightCase.1@4245,4320 lightCase.2@2035,2195 lightCase.2@2035,3225 lightCase.2@4045,2195 lightCase.2@4045,3225 lightCase.2@4045,4320 Power.1@1115,2455 Power.1@1115,3485 Power.1@3125,2455 Power.1@3125,3485 Power.1@3125,4580 Power.2@1115,2355 Power.2@1115,3385 Power.2@3125,2355 Power.2@3125,3385 Power.2@3125,4480 Q0.1@2618.74,2500 Q0.1@2618.74,3530 Q0.1@4628.74,2500 Q0.1@4628.74,3530 Q0.1@4628.74,4625 Q0.2@2711.26,2537.4 Q0.2@2711.26,3567.4 Q0.2@4721.26,2537.4 Q0.2@4721.26,3567.4 Q0.2@4721.26,4662.4 Q0.3@2711.26,2462.6 Q0.3@2711.26,3492.6 Q0.3@4721.26,2462.6 Q0.3@4721.26,3492.6 Q0.3@4721.26,4587.6 Q1.1@2506.26,2505 Q1.1@2506.26,3535 Q1.1@4516.26,2505 Q1.1@4516.26,3535 Q1.1@4516.26,4630 Q1.2@2413.74,2467.6 Q1.2@2413.74,3497.6 Q1.2@4423.74,2467.6 Q1.2@4423.74,3497.6 Q1.2@4423.74,4592.6 Q1.3@2413.74,2542.4 Q1.3@2413.74,3572.4 Q1.3@4423.74,2542.4 Q1.3@4423.74,3572.4 Q1.3@4423.74,4667.4 R0.1@1250,1954.57 R0.1@1250,2984.57 R0.1@3260,1954.57 R0.1@3260,2984.57 R0.1@3260,4079.57 R0.2@1250,2025.43 R0.2@1250,3055.43 R0.2@3260,2025.43 R0.2@3260,3055.43 R0.2@3260,4150.43 R1.1@1475,1944.57 R1.1@1475,2974.57 R1.1@3485,1944.57 R1.1@3485,2974.57 R1.1@3485,4069.57 R1.2@1475,2015.43 R1.2@1475,3045.43 R1.2@3485,2015.43 R1.2@3485,3045.43 R1.2@3485,4140.43 R2.1@1680,1949.57 R2.1@1680,2979.57 R2.1@3690,1949.57 R2.1@3690,2979.57 R2.1@3690,4074.57 R2.2@1680,2020.43 R2.2@1680,3050.43 R2.2@3690,2020.43 R2.2@3690,3050.43 R2.2@3690,4145.43 R3.1@1880,1954.57 R3.1@1880,2984.57 R3.1@3890,1954.57 R3.1@3890,2984.57 R3.1@3890,4079.57 R3.2@1880,2025.43 R3.2@1880,3055.43 R3.2@3890,2025.43 R3.2@3890,3055.43 R3.2@3890,4150.43 R4.1@2085,1949.57 R4.1@2085,2979.57 R4.1@4095,1949.57 R4.1@4095,2979.57 R4.1@4095,4074.57 R4.2@2085,2020.43 R4.2@2085,3050.43 R4.2@4095,2020.43 R4.2@4095,3050.43 R4.2@4095,4145.43 R5.1@2300,1949.57 R5.1@2300,2979.57 R5.1@4310,1949.57 R5.1@4310,2979.57 R5.1@4310,4074.57 R5.2@2300,2020.43 R5.2@2300,3050.43 R5.2@4310,2020.43 R5.2@4310,3050.43 R5.2@4310,4145.43 R6.1@2515,1949.57 R6.1@2515,2979.57 R6.1@4525,1949.57 R6.1@4525,2979.57 R6.1@4525,4074.57 R6.2@2515,2020.43 R6.2@2515,3050.43 R6.2@4525,2020.43 R6.2@4525,3050.43 R6.2@4525,4145.43 R7.1@2740,1949.57 R7.1@2740,2979.57 R7.1@4750,1949.57 R7.1@4750,2979.57 R7.1@4750,4074.57 R7.2@2740,2020.43 R7.2@2740,3050.43 R7.2@4750,2020.43 R7.2@4750,3050.43 R7.2@4750,4145.43 R8.1@2170,2394.57 R8.1@2170,3424.57 R8.1@4180,2394.57 R8.1@4180,3424.57 R8.1@4180,4519.57 R8.2@2170,2465.43 R8.2@2170,3495.43 R8.2@4180,2465.43 R8.2@4180,3495.43 R8.2@4180,4590.43 R9.1@2165,2630.43 R9.1@2165,3660.43 R9.1@4175,2630.43 R9.1@4175,3660.43 R9.1@4175,4755.43 R9.2@2165,2559.57 R9.2@2165,3589.57 R9.2@4175,2559.57 R9.2@4175,3589.57 R9.2@4175,4684.57 R10.1@1694.57,2190 R10.1@1694.57,3220 R10.1@3704.57,2190 R10.1@3704.57,3220 R10.1@3704.57,4315 R10.2@1765.43,2190 R10.2@1765.43,3220 R10.2@3775.43,2190 R10.2@3775.43,3220 R10.2@3775.43,4315 R11.1@1355,2190 R11.1@1355,3220 R11.1@3365,2190 R11.1@3365,3220 R11.1@3365,4315 R11.2@1284.13,2190 R11.2@1284.13,3220 R11.2@3294.13,2190 R11.2@3294.13,3220 R11.2@3294.13,4315 R12.1@2104.57,2190 R12.1@2104.57,3220 R12.1@4114.57,2190 R12.1@4114.57,3220 R12.1@4114.57,4315 R12.2@2175.43,2190 R12.2@2175.43,3220 R12.2@4185.43,2190 R12.2@4185.43,3220 R12.2@4185.43,4315 R16.1@2165,2559.57 R16.1@2165,3589.57 R16.1@4175,2559.57 R16.1@4175,3589.57 R16.1@4175,4684.57 R16.2@2165,2630.43 R16.2@2165,3660.43 R16.2@4175,2630.43 R16.2@4175,3660.43 R16.2@4175,4755.43 R17.1@2170,2470.43 R17.1@2170,3500.43 R17.1@4180,2470.43 R17.1@4180,3500.43 R17.1@4180,4595.43 R17.2@2170,2399.57 R17.2@2170,3429.57 R17.2@4180,2399.57 R17.2@4180,3429.57 R17.2@4180,4524.57 smg.1@2385,2365 smg.1@2385,3395 smg.1@4395,2365 smg.1@4395,3395 smg.1@4395,4490 smg.2@2483.43,2365 smg.2@2483.43,3395 smg.2@4493.43,2365 smg.2@4493.43,3395 smg.2@4493.43,4490 smg.3@2581.85,2365 smg.3@2581.85,3395 smg.3@4591.85,2365 smg.3@4591.85,3395 smg.3@4591.85,4490 smg.4@2680.28,2365 smg.4@2680.28,3395 smg.4@4690.28,2365 smg.4@4690.28,3395 smg.4@4690.28,4490 smg.5@2778.7,2365 smg.5@2778.7,3395 smg.5@4788.7,2365 smg.5@4788.7,3395 smg.5@4788.7,4490 smg.6@2778.7,2665 smg.6@2778.7,3695 smg.6@4788.7,2665 smg.6@4788.7,3695 smg.6@4788.7,4790 smg.7@2680.28,2665 smg.7@2680.28,3695 smg.7@4690.28,2665 smg.7@4690.28,3695 smg.7@4690.28,4790 smg.8@2581.85,2665 smg.8@2581.85,3695 smg.8@4591.85,2665 smg.8@4591.85,3695 smg.8@4591.85,4790 smg.9@2483.43,2665 smg.9@2483.43,3695 smg.9@4493.43,2665 smg.9@4493.43,3695 smg.9@4493.43,4790 smg.10@2385,2665 smg.10@2385,3695 smg.10@4395,2665 smg.10@4395,3695 smg.10@4395,4790